# Altium PCB 3501.PcbDoc
Units mil, origin at the board's own origin, x right, y up, seen from the top; angles counter-clockwise.
Board outline 6000 x 4000 mil, 2 copper layers (Top Layer, Bottom Layer); 16 components, 12 nets, 56 pads, 0 vias.
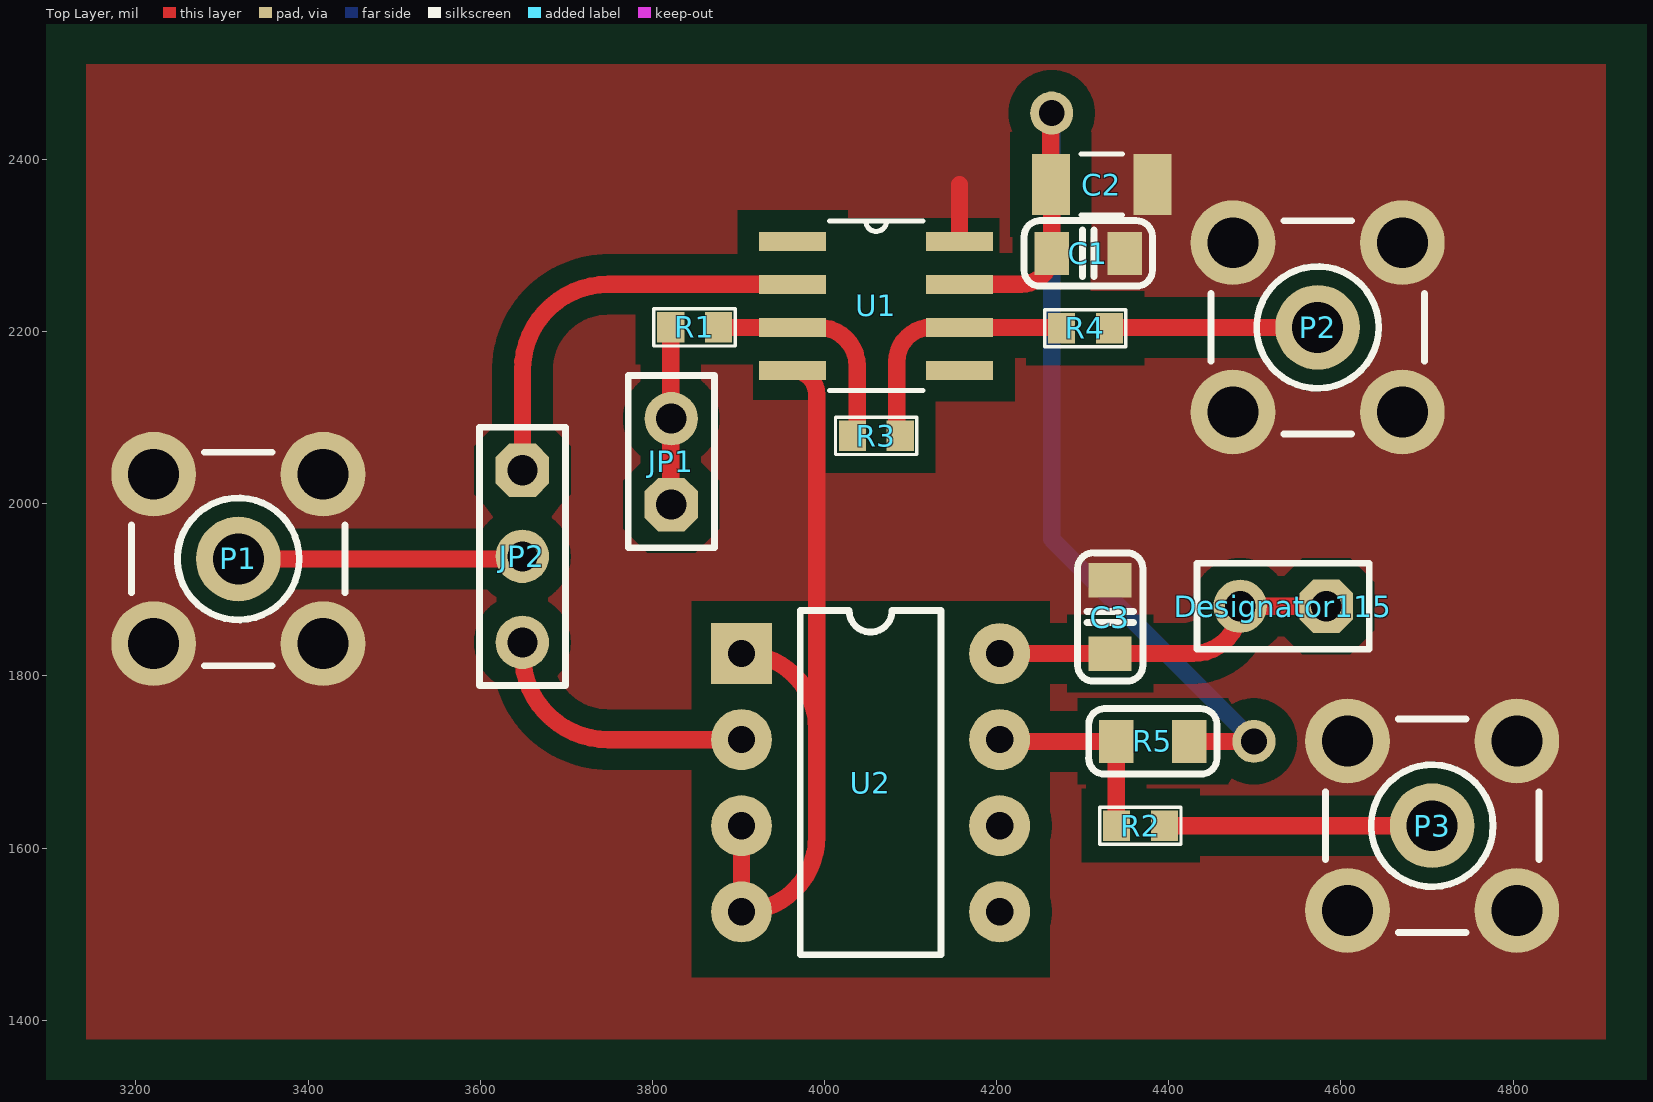
[diagram p0: Top Layer view]
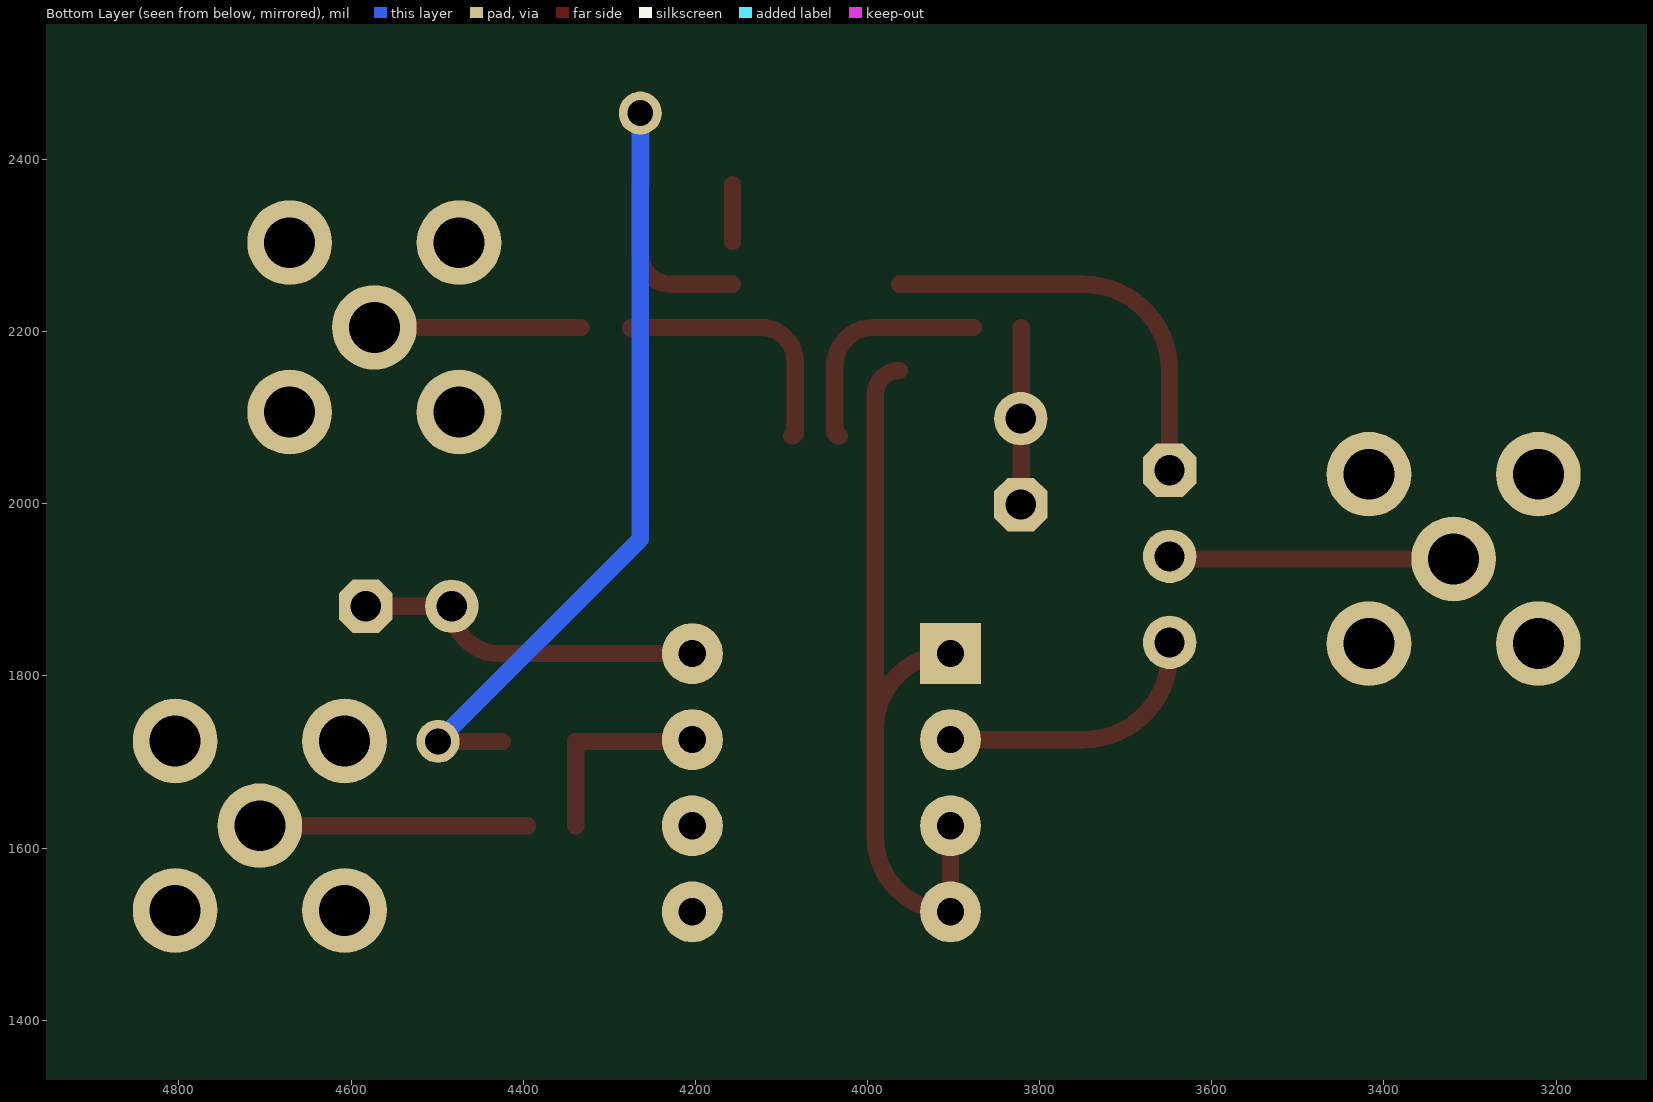
[diagram p1: Bottom Layer view, seen from below]

## Layer stack, top to bottom
Top Solder: solder mask 0.4, Solder Resist, Dk 3.5
Top Layer: signal copper 1.4
Dielectric1: dielectric 12.6, FR-4, Dk 4.8
Bottom Layer: signal copper 1.4
Bottom Solder: solder mask 0.4, Solder Resist, Dk 3.5

## Board outline
1000,1000 7000,1000 7000,5000 1000,5000

## Design rules (kind name [scope] priority, off if disabled: settings)
Clearance [All] p1: gap=25 ignorepadtopadclearanceinfootprint=FALSE except(0: Arc-Hole Track-Hole SMDPad-Hole THPad-Hole Via-Hole Fill-Hole Poly-Hole Region-Hole Text-Hole)
PolygonConnect [All] p1: connectstyle=Direct reliefconductorwidth=10 reliefentries=4 polygonreliefangle="90 Angle" airgapwidth=10
RoutingVias [All] p1: holewidth=28 width=50 viastyle="Through Hole" minholewidth=28 minwidth=50 maxholewidth=28 maxwidth=50
SolderMaskExpansion [All] p1: expansion=4
Width [All] p1: maxlimit=20 minlimit=20 preferedwidth=20
30 further rules are at their usual default settings.

## Classes and differential pairs
component class 3501: C1 C2 C3 JP1 JP2 P1 P2 P3 R1 R2 R3 R4 R5 U1 U2

## Components (designator, comment, footprint, x,y, rotation, side; value= is the part's Value field where it differs from the comment)
C1 "Cap" 0805C 4264,2291 r0 top
C2 "EC" 1206 4322,2371 r0 top
C3 "Cap" 0805C 4332,1911 r270 top
Designator115 "Comment" header2 4583,1881 r180 top
JP1 "HEADER 2" header2 3822,1999 r90 top
JP2 "HEADER 3" header3 3649,2039 r270 top
P1 "SMB" SMB_V-RJ45 3319,1936 r0 top
P2 "SMB" SMB_V-RJ45 4573,2205 r0 top
P3 "SMB" SMB_V-RJ45 4706,1626 r90 top
R1 "Res2" R-0603 3822,2205 r0 top
R2 "Res2" R-0603 4340,1626 r0 top
R3 "Res2" R-0603 4033,2079 r0 top
R4 "Res2" R-0603 4276,2204 r0 top
R5 "Res2" 0805R 4339,1724 r0 top
U1 "TLV3501" D8 4060,2230 r0 top
U2 "LM311D" DIP8 3904,1826 r0 top

## Footprints (in the part's own frame and the unit in brackets; to place one, negate y for a bottom-side part, rotate by r counter-clockwise, add the part's x,y. Pads: shape width x height; smd on the part's side, far side on the other; paste and mask are expansions set on the pad)
0805C [mil]
  rect 40x50 smd: 1(0,0) 2(85,0)
  silkscreen extent -32,-38 117,38, body extent 0,-24 79,24, height 37
0805R [mil]
  rect 40x50 smd: 1(0,0) 2(85,0)
  silkscreen extent -32,-38 117,38, body extent 3,-25 81,25, height 22
1206 [mil]
  rect 44x71 smd: 1(-59,0) 2(59,0)
  silkscreen extent -24,-36 24,36
D8 [mil]
  rect 78x22 smd: 1(-97,75) 2(-97,25) 3(-97,-25) 4(-97,-75) 5(97,-75) 6(97,-25) 7(97,25) 8(97,75)
  silkscreen extent -54,-98 54,98
DIP8 [mm]
  rect 1.8x1.8 hole 0.8: 1(-0.01,0)
  round 1.8 hole 0.8: 2(-0.01,-2.54) 3(-0.01,-5.08) 4(-0.01,-7.62) 5(7.61,-7.62) 6(7.61,-5.08) 7(7.61,-2.54) 8(7.61,0)
  silkscreen extent 1.72,-8.89 5.87,1.27
header2 [mil]
  oct 62x62 hole 35: 1(0,0)
  round 62 hole 35: 2(100,0)
  silkscreen extent -50,-50 150,50
header3 [mil]
  oct 62x62 hole 35: 1(0,0)
  round 62 hole 35: 2(100,0) 3(200,0)
  silkscreen extent -50,-50 250,50
R-0603 [mm]
  rect 0.8x0.9 smd: 1(-0.014,0) 2(1.397,0)
  silkscreen extent -0.51,-0.55 1.89,0.55, body extent -0.09,-0.38 1.51,0.42, height 0.6
SMB_V-RJ45 [mm] "Connector; SMB"
  round 2.5 hole 1.5: 1(0,0) 2(-2.5,-2.5) 2(-2.5,2.5) 2(2.5,-2.5) 2(2.5,2.5)
  silkscreen extent -3.15,-3.15 3.15,3.15

## Part data
C1 C3: "Capacitor"
C2: library part Cap2, "Bi-Polar Capacitor"
P1 P2 P3: "SMB Straight Connector"
R1 R2 R3 R4 R5: library part Res, "Resistor"
U2: "High-Performance Voltage Comparator"

## Free pads (board coordinates)
  round 50 hole 30: 20(4264,2454) 21(4499,1724)

## Nets (pads, with @x,y where several pads share a name; then routed paths per layer and width w, separated by ;. In a path a pad name is that pad's centre, name@x,y a point inside that pad or via, vN(x,y) a via of type N, cw(c..) or ccw(c..) an arc to the next point about the centre after c; other vN are vias at no path point)
GND: C1.2 C2.2 C3.1 P1.2 P2.2 P3.2 U1.4 U1.8 U2.1 U2.3 U2.4 | length 998.2
  Top Layer w20: U2.3 U2.4 ccw(c3903.59,1613.41) 3991,1613.41 3991,1738.59 ; U2.1 cw(c3903.59,1738.59) 3991,1738.59 ; U1.4 cw(c3963,2127) 3991,2127 3991,1738.59 ; U1.8 4157,2371
NetJP1_1: JP1.1 JP1.2 R1.1 | length 206.6
  Top Layer w20: R1.1 3821.44,1999 JP1.1
NetJP2_1: JP2.1 U1.2 | length 487.1
  Top Layer w20: JP2.1 3649,2155 cw(c3749,2155) 3749,2255 U1.2
NetJP2_2: JP2.2 P1.1 | length 331.7
  Top Layer w20: P1.1 3646,1936 ccw(c3646,1939) JP2.2
NetJP2_3: JP2.3 U2.2 | length 324.7
  Top Layer w20: JP2.3 3649,1826 ccw(c3749,1826) 3749,1726 U2.2
NetP2_1: P2.1 R4.2 | length 240
  Top Layer w20: R4.2@4333,2205 P2.1
NetP3_1: P3.1 R2.2 | length 311
  Top Layer w20: R2.2 P3.1
NetR1_2: R1.2 R3.1 U1.3 | length 270.9
  Top Layer w20: R1.2 U1.3 3993,2205 cw(c3993,2160) 4038,2160 4038,2084.56 cw(c4032.44,2084.56) R3.1
NetR2_1: R2.1 R5.1 U2.7 | length 235
  Top Layer w20: U2.7 ccw(c4205.59,1726) 4205.59,1724 R5.1 4339,1626 R2.1
NetR3_2: R3.2 R4.1 U1.6 | length 303.1
  Top Layer w20: R3.2 cw(c4088,2083) 4084,2083 4084,2165 cw(c4124,2165) 4124,2205 U1.6 4274.44,2205 cw(c4274.44,2204) R4.1
VCC: C3.2 Designator115.1 Designator115.2 U2.8 | length 410.8
  Top Layer w20: U2.8 C3.2 4428,1826 ccw(c4428,1881) Designator115.2 Designator115.1
VCC3.3: C1.1 C2.1 pad.20 pad.21 R5.2 U1.7 | length 1194.5
  Top Layer w20: U1.7 4228,2255 ccw(c4228,2291) C1.1 4264,2371 C2.1 4263,2453 cw(c4264,2453) pad.20 ; R5.2 pad.21
  Bottom Layer w20: pad.20 4264,1959 pad.21
pads on no net: U1.1 U1.5 U2.5 U2.6

## Polygon pours and split planes (outlines as drawn)
GND on Top Layer "Bottom Layer-No Net" (solid, remove dead copper, pour order 4): 3142,2268 3142,1609 3142,1378 4849,1378 4908,1378 4908,2363 4908,2511 3443,2511 3142,2511 3142,1960

## Other copper
Top Layer:
  pour cut-out: 3846,1887 4262,1887 4262,1450 3846,1450
  pour cut-out: 3917,2332 4203,2332 4203,2121 3917,2121